# Altium PCB DIOT_EEM_Adapter.pcbdoc (part 2 of 2)
Units mil, origin at the board's own origin, x right, y up, seen from the top; angles counter-clockwise.
Board outline 3439.52 x 3937.01 mil, 6 copper layers (TopLayer, MidLayer1, MidLayer2, SignalLayer1, Internal Plane 1, BottomLayer), stack 60.157 mil thick; 45 components, 66 nets, 409 pads, 76 vias.
Unrouted connection lines stored in the file: 1.
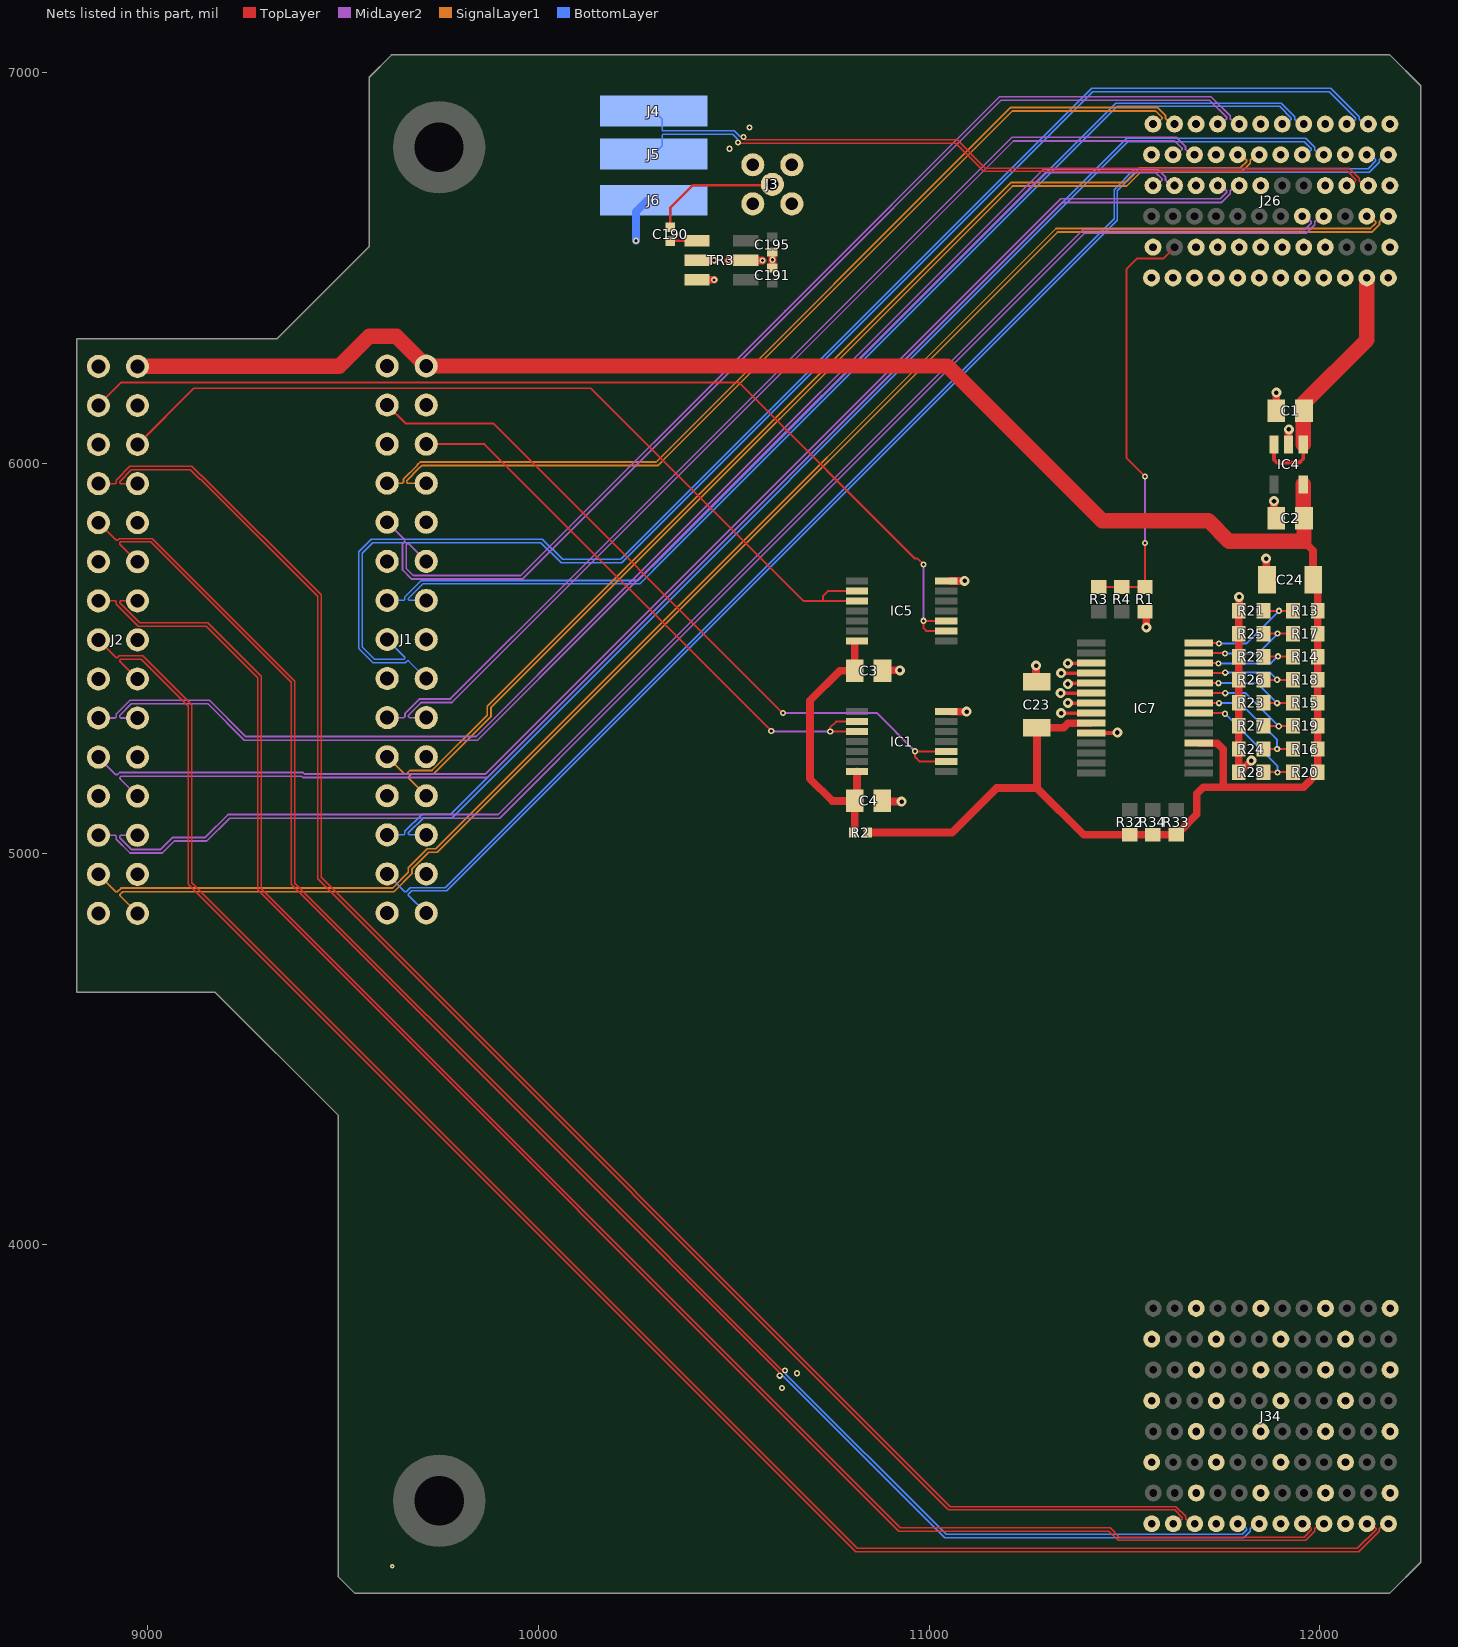
[diagram p6: the nets of this part, all layers, seen from the top]

## Via types
v1: diameter 15.75, hole 7.87, TopLayer to BottomLayer, tented both sides, 56 vias
v2: diameter 25.59, hole 11.81, TopLayer to BottomLayer, tented both sides, 19 vias
v3: diameter 11.81, hole 3.94, TopLayer to BottomLayer, tented both sides, 1 vias

## Nets (pads, with @x,y where several pads share a name; then routed paths per layer and width w, separated by ;. In a path a pad name is that pad's centre, name@x,y a point inside that pad or via, vN(x,y) a via of type N, cw(c..) or ccw(c..) an arc to the next point about the centre after c; other vN are vias at no path point) (continued)
GND: C1.1 C2.1 C3.1 C4.1 C23.1 C24.1 C191.1 C195.2 IC1.7 IC4.2 IC5.7 IC7.3 IC7.4 IC7.5 IC7.6 IC7.7 IC7.8 IC7.10 J1.1 J1.4 J1.7 J1.10 J1.13 J1.16 J1.19 J1.22 J1.25 J2.1 J2.4 J2.7 J2.10 J2.13 J2.16 J2.19 J2.22 J2.25 J3.2 J6.1 J26.A2 J26.A4 J26.A6 J26.C1 J26.C5 J26.D2 J26.D4 J26.D6 J26.E2 J26.F1 J26.F5 J26.G2 J26.G4 J26.G6 J26.I1 J26.I5 J26.J2 J26.J4 J26.J6 J26.L1 J26.L5 J34.A2 J34.A4 J34.A6 J34.A8 J34.C1 J34.C3 J34.C5 J34.C7 J34.D2 J34.D4 J34.D6 J34.D8 J34.F1 J34.F3 J34.F5 J34.F7 J34.G2 J34.G4 J34.G6 J34.G8 J34.I1 J34.I3 J34.I5 J34.I7 J34.J2 J34.J4 J34.J6 J34.J8 J34.L1 J34.L3 J34.L5 J34.L7 R1.1 R21.1 R22.1 R23.1 R24.1 R25.1 R26.1 R27.1 R28.1 TR3.1 TR3.2 TR3.5 | length 1725.7
  TopLayer w9.84: v2(11337,5411.61) IC7.6@11414.91,5411.61 ; v2(11338,5360.43) IC7.8@11414.91,5360.43 ; v2(11338,5462.79) IC7.4@11414.91,5462.79 ; v2(11355,5488) 11355.38,5488.38 IC7.3@11414.91,5488.38 ; v2(11355.38,5386.81) 11356.17,5386.02 IC7.7@11414.91,5386.02 ; v2(11355.38,5435) 11357.57,5437.2 IC7.5@11414.91,5437.2 ; IC7.10@11414.91,5309.24 11480.24,5309.24 v2(11482,5311)
  TopLayer w20: TR3.1@10406.02,6469.64 v1(10450,6469.64) ; TR3.2@10406.02,6519.64 v1(10450,6519.64) ; v1(10487,6519) 10530.58,6519 TR3.5@10531.22,6519.64 10531.86,6519 v1(10574,6519) ; C191.1@10598.84,6499.93 10599,6500.09 v1(10599,6521) 10599,6540.32 C195.2@10598.84,6540.48 ; C3.1@10887.16,5470.11 v2(10925,5470.11) ; C4.1@10892.16,5134.11 v2(10930,5134.11) ; IC5.7@11053.16,5699.11 v2(11091,5699.11) ; IC1.7@11058.16,5364.11 v2(11096,5364.11) ; C23.1@11273.89,5444.16 v2(11273.89,5482) ; v2(11556.11,5580) R1.1@11556.11,5617.84 ; R28.1@11792.11,5204.84 11792.11,5211 11800.43,5219.33 11805.03,5219.33 11824.65,5238.95 v2(11824.79,5238.95) ; R28.1@11792.72,5209.65 R24.1@11792.72,5268.7 R27.1@11792.72,5327.76 R23.1@11792.72,5386.81 R26.1@11792.72,5445.87 R22.1@11792.72,5504.92 R25.1@11792.72,5563.98 R21.1@11792.72,5623.03 ; R21.1@11793.89,5620.16 v2(11793.89,5658) ; C24.1@11862.89,5718.16 v2(11862.89,5756) ; v2(11882.89,5903) 11882.89,5865.16 C2.1@11888.8,5859.25 ; C1.1@11888.8,6134.84 11888.8,6180.8 v2(11889,6181) ; IC4.2@11920.3,6048.23 11920.3,6086.3 v2(11921,6087)
  BottomLayer w20: v1(10250.06,6569.64) 10250.06,6643.86 10279.43,6673.23 J6.1@10295.28,6673.23
  other v1: 10624,3633 10662,3671 10489,6805 10540,6859
  other v3: 9625.98,3177.17
I2C0_SCL: IC1.2 IC1.3 J1.27 | length 1897
  TopLayer w5: J1.27@9613,6149 9660,6102 9884.43,6102 v1@10625.71,5360.71 ; IC1.2@11043.84,5236.62 10976.38,5236.62 10964,5249 v1(10964,5263) 10964.79,5262.21 IC1.3@11043.84,5262.21
  MidLayer2 w5: v1(10626,5361) 10866,5361 v1(10964,5263)
I2C0_SDA: IC1.9 IC1.10 J1.26 | length 1492.5
  TopLayer w5: J1.26@9713,6049 9862,6049 v1(10596,5315) ; IC1.10@10815.5,5313.39 v1(10747,5313.39) 10747,5324 10761.98,5338.98 IC1.9@10815.5,5338.98
  MidLayer2 w5: v1(10596,5315) 10597.61,5313.39 v1(10747,5313.39)
I2C1_SCL: IC5.2 IC5.3 J2.27 | length 2610.9
  TopLayer w5: J2.27@8874,6148 8933,6207 10513,6207 10964,5756 10971,5756 v1(10986,5741) ; IC5.2@11043.84,5571.27 10992.73,5571.27 10986,5578 v1(10986,5596.86) IC5.3@11043.84,5596.86
  MidLayer2 w5: v1(10986,5596.86) v1(10986,5741)
I2C1_SDA: IC5.9 IC5.10 J2.26 | length 2231.6
  TopLayer w5: J2.26@8974,6048 9118,6192 10134,6192 10677.96,5648.04 10728,5648.04 ; IC5.10@10815.5,5648.04 10728,5648.04 ; IC5.9@10815.5,5673.63 10741.63,5673.63 10728,5660 10728,5648.04
ID0: IC7.21 R20.1 R28.2 | length 349.4
  TopLayer w5: IC7.21@11690.5,5360.43 11756.11,5360.43 v1(11757.53,5359) ; R28.2@11855.71,5209.65 R20.1@11931.83,5209.65
  BottomLayer w5: v1(11757.53,5359) 11892,5224.53 v1(11892,5209)
ID1: IC7.22 R16.1 R24.2 | length 338.6
  TopLayer w5: IC7.22@11690.5,5386.02 v1(11742,5386.02) ; R24.2@11855.71,5268.7 R16.1@11931.83,5268.7
  BottomLayer w5: v1(11742,5386.02) 11796.98,5386.02 11891,5292 v1(11891,5269)
ID2: IC7.23 R19.1 R27.2 | length 315.7
  TopLayer w5: IC7.23@11690.5,5411.61 v1(11758,5411.61) ; R27.2@11855.71,5327.76 R19.1@11931.83,5327.76
  BottomLayer w5: v1(11758,5411.61) 11810.39,5411.61 v1(11895,5327)
ID3: IC7.24 R15.1 R23.2 | length 297.8
  TopLayer w5: IC7.24@11690.5,5437.2 v1(11740.62,5437.2) ; R23.2@11855.71,5386.81 R15.1@11931.83,5386.81
  BottomLayer w5: v1(11740.62,5437.2) 11839.82,5437.2 v1(11891,5386.02)
ID4: IC7.25 R18.1 R26.2 | length 284.6
  TopLayer w5: IC7.25@11690.5,5462.79 11756.79,5462.79 v1(11758,5464) ; R26.2@11855.71,5445.87 R18.1@11931.83,5445.87
  BottomLayer w5: v1(11758,5464) 11873,5464 v1(11891,5446)
ID5: IC7.26 R14.1 R22.2 | length 286.2
  TopLayer w5: IC7.26@11690.5,5488.38 11740.62,5488.38 v1(11741,5488) ; R22.2@11855.71,5504.92 R14.1@11931.83,5504.92
  BottomLayer w5: v1(11741,5488) 11875,5488 v1(11893,5506)
ID6: IC7.27 R17.1 R25.2 | length 299.1
  TopLayer w5: IC7.27@11690.5,5513.97 11756.62,5513.97 v1(11757.53,5513.06) ; R25.2@11855.71,5563.98 R17.1@11931.83,5563.98
  BottomLayer w5: v1(11757.53,5513.06) 11841.06,5513.06 v1(11892,5564)
ID7: IC7.28 R13.1 R21.2 | length 326.7
  TopLayer w5: IC7.28@11690.5,5539.56 11746.44,5539.56 11746.44,5539.92 11745.52,5539 v1(11742,5539) ; R21.2@11855.71,5623.03 11856.29,5622.45 v1(11896,5622.45) 11931.24,5622.45 R13.1@11931.83,5623.03
  BottomLayer w5: v1(11742,5539) 11746.14,5539 11746.57,5539.43 11747,5539 11812.55,5539 v1(11896,5622.45)
LVDS0_N: J1.3 J26.B5 | length 3399.6
  BottomLayer w3.74: J1.3@9613,4949 9658.39,4903.61 9661.49,4903.61 9671.93,4914.06 9761.81,4914.06 11473.34,6625.59 11473.34,6700.59 11526.75,6754 12123.52,6754 12143.68,6774.16 12143.68,6777.26 12141.49,6779.45 12141.19,6779.45 12131.16,6789.49 J26.B5@12120.45,6789.49
LVDS0_P: J1.2 J26.A5 | length 3406.8
  BottomLayer w3.74: J1.2@9713,4849 9667.61,4894.39 9667.61,4897.49 9675.52,4905.4 9765.4,4905.4 11482,6622 11482,6697 11530.34,6745.34 12127.11,6745.34 12152.34,6770.57 12152.34,6777.26 12154.53,6779.45 12154.82,6779.45 12164.86,6789.49 J26.A5@12175.57,6789.49
LVDS1_N: J1.6 J26.E5 | length 3132.2
  BottomLayer w3.74: J1.6@9713,5049 9669.52,5049 9667.33,5051.19 9667.33,5054.29 9706.38,5093.34 9779.34,5093.34 11509,6823 11960.14,6823 11978.32,6804.82 11978.32,6801.72 11976.13,6799.53 11975.84,6799.53 11965.8,6789.49 J26.E5@11955.09,6789.49
LVDS1_P: J1.5 J26.D5 | length 3160.9
  BottomLayer w3.74: J1.5@9613,5049 9656.48,5049 9658.67,5051.19 9658.67,5057.88 9702.79,5102 9775.75,5102 9805.38,5131.62 11505.41,6831.66 11963.73,6831.66 11986.98,6808.4 11986.98,6801.72 11989.18,6799.53 11989.47,6799.53 11999.51,6789.49 J26.D5@12010.21,6789.49
LVDS2_N: J1.9 J26.H5 | length 2913.5
  SignalLayer1 w4.53: J1.9@9613,5249 9657.85,5204.15 9661.6,5204.15 9671.12,5213.67 9727.64,5213.67 9869.3,5355.33 9869.3,5378.27 10017.51,5526.48 11210.03,6719 11501.92,6719 11538.92,6756 11796.48,6756 11812.67,6772.19 11812.67,6775.94 11799.13,6789.49 J26.H5@11789.74,6789.49
LVDS2_P: J1.8 J26.G5 | length 2921.2
  SignalLayer1 w4.53: J1.8@9713,5149 9668.15,5193.85 9668.15,5197.6 9674.96,5204.41 9731.47,5204.41 9878.56,5351.5 9878.56,5374.44 10024.06,5519.94 11213.86,6709.75 11505.75,6709.75 11542.75,6746.75 11800.31,6746.75 11821.93,6768.36 11821.93,6775.94 11835.47,6789.49 J26.G5@11844.86,6789.49
LVDS3_N: J1.12 J26.K5 | length 2678.5
  MidLayer2 w4.53: J1.12@9713,5349 9670.28,5349 9667.63,5351.65 9667.63,5355.4 9699.97,5387.75 9778.75,5387.75 10100.29,5709.29 11216,6825 11629.1,6825 11647.32,6806.78 11647.32,6803.03 11633.78,6789.49 J26.K5@11624.39,6789.49
LVDS3_P: J1.11 J26.J5 | length 2709.1
  MidLayer2 w4.53: J1.11@9613,5349 9655.72,5349 9658.37,5351.65 9658.37,5359.23 9696.14,5397 9774.92,5397 10096.46,5718.54 11212.17,6834.25 11632.93,6834.25 11656.57,6810.61 11656.57,6803.03 11670.11,6789.49 J26.J5@11679.5,6789.49
LVDS4_N: J1.15 J26.C6 | length 3566
  BottomLayer w3.74: 9549,5543 9549,5770 9576,5797 10006.75,5797 10058.48,5745.27 10213.27,5745.27 10218,5750 11419.34,6951.34 12024.71,6951.34 12092.5,6883.56 12092.5,6880.46 12090.31,6878.27 12090.01,6878.27 12079.97,6868.23 J26.C6@12069.27,6868.23
  BottomLayer w3.94: 9549,5543 9549,5529.53 9580.33,5498.19 9655.93,5498.19 9658.24,5500.5 9658.24,5503.76 J1.15@9613,5549
LVDS4_P: J1.14 J26.B6 | length 3616.7
  BottomLayer w3.74: 9540.34,5539.33 9540.34,5773.59 9572.41,5805.66 10010.34,5805.66 10062.07,5753.93 10209.68,5753.93 10211.88,5756.12 11415.75,6960 12028.3,6960 12101.16,6887.14 12101.16,6880.46 12103.35,6878.27 12103.64,6878.27 12113.68,6868.23 J26.B6@12124.39,6868.23
  BottomLayer w3.94: 9540.14,5539.33 9540.14,5525.86 9576.66,5489.34 9659.6,5489.34 9664.5,5494.24 9667.76,5494.24 J1.14@9713,5449
LVDS5_N: J1.18 J26.F6 | length 2874.4
  BottomLayer w3.74: 10294.41,5726.41 11481.34,6913.34 11897.36,6913.34 11927,6883.7 11927,6880.6 11914.62,6868.23 J26.F6@11903.91,6868.23
  BottomLayer w3.94: J1.18@9713,5649 9669.74,5649 9667.43,5651.3 9667.43,5654.57 9704,5691.14 10259.42,5691.14 10294.54,5726.27
LVDS5_P: J1.17 J26.E6 | length 2903.4
  BottomLayer w3.74: 10290.88,5735.12 11477.75,6922 11900.95,6922 11935.66,6887.29 11935.66,6880.9 11948.32,6868.23 J26.E6@11959.03,6868.23
  BottomLayer w3.94: J1.17@9613,5649 9656.26,5649 9658.57,5651.3 9658.57,5658.24 9700.34,5700 10255.75,5700 10290.88,5735.12
LVDS6_N: J1.21 J26.I6 | length 2819.6
  MidLayer2 w4.53: J1.21@9613,5849 9657.85,5804.14 9657.85,5800.39 9652.49,5795.03 9652.49,5726.79 9675.71,5703.57 9958.65,5703.57 10635.33,6380.25 11184.22,6929.13 11717.88,6929.13 11761.49,6885.52 11761.49,6881.77 11747.95,6868.23 J26.I6@11738.56,6868.23
LVDS6_P: J1.20 J26.H6 | length 2812.1
  MidLayer2 w4.53: J1.20@9713,5749 9668.15,5793.85 9664.4,5793.85 9661.74,5791.2 9661.74,5730.62 9679.54,5712.82 9697.82,5712.82 9697.96,5712.68 9728.04,5712.68 9728.18,5712.82 9954.82,5712.82 10631.5,6389.5 11180.39,6938.39 11721.71,6938.39 11770.74,6889.35 11770.74,6881.77 11784.29,6868.23 J26.H6@11793.68,6868.23
LVDS7_N: J1.24 J26.L6 | length 2419.1
  SignalLayer1 w4.53: J1.24@9713,5949 9665.66,5949 9663.01,5951.65 9663.01,5955.73 9694.14,5986.86 9701.42,5994.14 10304.58,5994.14 10305.14,5994.14 10325.81,6014.81 11212.64,6901.64 11580.02,6901.64 11596.14,6885.52 11596.14,6881.77 11582.59,6868.23 J26.L6@11573.2,6868.23
LVDS7_P: J1.23 J26.K6 | length 2440.6
  SignalLayer1 w4.53: J1.23@9613,5949 9651.89,5949 9654.54,5951.65 9654.54,5959.23 9690.86,5995.56 ; 9690.31,5996.11 9697.59,6003.39 10300.75,6003.39 10301.31,6003.39 11208.81,6910.9 11583.85,6910.9 11605.39,6889.35 11605.39,6881.77 11618.93,6868.23 J26.K6@11628.32,6868.23
LVDS8_N: J2.3 J26.B3 | length 4036
  SignalLayer1 w4.53: J2.3@8874,4948 8918.85,4903.15 8922.6,4903.15 8932.12,4912.67 9626.64,4912.67 9667.15,4953.18 9667.15,4964.7 9716.11,5013.67 9737.55,5013.67 10155.94,5432.06 11324.89,6601 12129.67,6601 12143.38,6614.71 12143.38,6618.46 12129.84,6632.01 J26.B3@12120.45,6632.01
LVDS8_P: J2.2 J26.A3 | length 4043.6
  SignalLayer1 w4.53: J2.2@8974,4848 8929.15,4892.85 8929.15,4896.6 8935.96,4903.41 9630.47,4903.41 9676.4,4949.35 9676.4,4960.87 9719.95,5004.41 9741.38,5004.41 10159.77,5422.81 11328.72,6591.75 12133.5,6591.75 12152.63,6610.88 12152.63,6618.46 12166.18,6632.01 J26.A3@12175.57,6632.01
LVDS9_N: J2.6 J26.E3 | length 3808.3
  MidLayer2 w4.53: J2.6@8974,5048 8931.28,5048 8928.63,5045.35 8928.63,5041.6 8958.54,5011.68 9033.15,5011.68 9064.01,5042.54 9147.46,5042.54 9205.92,5101 9896.92,5101 11393.92,6598 11961.31,6598 11978.03,6614.71 11978.03,6618.46 11964.48,6632.01 J26.E3@11955.09,6632.01
LVDS9_P: J2.5 J26.D3 | length 3839
  MidLayer2 w4.53: J2.5@8874,5048 8916.72,5048 8919.37,5045.35 8919.37,5037.77 8954.71,5002.43 9036.98,5002.43 9067.84,5033.29 9151.29,5033.29 9209.75,5091.75 9900.75,5091.75 10205.75,5396.75 11397.75,6588.75 11965.15,6588.75 11987.28,6610.88 11987.28,6618.46 12000.82,6632.01 J26.D3@12010.21,6632.01
LVDS10_N: J2.9 J26.I4 | length 3558.6
  MidLayer2 w4.53: J2.9@8874,5248 8918.85,5203.15 8922.6,5203.15 8927.97,5208.51 9397.73,5208.51 9401.23,5205 9864.92,5205 11336.92,6677 11745.04,6677 11761.49,6693.45 11761.49,6697.2 11747.95,6710.75 J26.I4@11738.56,6710.75
LVDS10_P: J2.8 J26.H4 | length 3566.2
  MidLayer2 w4.53: J2.8@8974,5148 8929.15,5192.85 8929.15,5196.6 8931.8,5199.26 9393.89,5199.26 9397.4,5195.75 9868.75,5195.75 10170.75,5497.75 11340.75,6667.75 11748.87,6667.75 11770.74,6689.62 11770.74,6697.2 11784.29,6710.75 J26.H4@11793.68,6710.75
LVDS11_N: J2.12 J26.L4 | length 3409.3
  MidLayer2 w4.53: J2.12@8974,5348 8931.28,5348 8928.63,5350.65 8928.63,5354.4 8958.54,5384.32 9154.6,5384.32 9247.63,5291.29 9844.29,5291.29 10158.79,5605.79 11297,6744 11580.18,6744 11596.14,6728.04 11596.14,6724.29 11582.59,6710.75 J26.L4@11573.2,6710.75
LVDS11_P: J2.11 J26.K4 | length 3440
  MidLayer2 w4.53: J2.11@8874,5348 8916.72,5348 8919.37,5350.65 8919.37,5358.23 8954.71,5393.57 9158.43,5393.57 9251.46,5300.54 9840.46,5300.54 10154.96,5615.04 11293.17,6753.25 11584.01,6753.25 11605.39,6731.87 11605.39,6724.29 11618.93,6710.75 J26.K4@11628.32,6710.75
LVDS12_N: J2.15 J34.B1 | length 4555.4
  TopLayer w3.74: J2.15@8874,5548 8919.39,5502.61 8922.49,5502.61 8927.21,5507.34 8987.25,5507.34 9113,5381.59 9113,4926 10816.34,3222.66 12096.3,3222.66 12144.17,3270.54 12144.17,3273.64 12141.98,3275.83 12141.69,3275.83 12131.65,3285.87 J34.B1@12120.94,3285.87
LVDS12_P: J2.14 J34.A1 | length 4562.6
  TopLayer w3.74: J2.14@8974,5448 8928.61,5493.39 8928.61,5496.49 8930.8,5498.68 8983.66,5498.68 9104.34,5378 9104.34,4922.41 10807.68,3219.07 10812.75,3214 12099.88,3214 12152.83,3266.95 12152.83,3273.64 12155.03,3275.83 12155.32,3275.83 12165.36,3285.87 J34.A1@12176.06,3285.87
LVDS13_N: J2.18 J34.E1 | length 4451.6
  TopLayer w3.74: J2.18@8974,5656.66 8965.34,5648 8930.52,5648 8928.33,5645.81 8928.33,5642.71 8979.44,5591.6 9153.99,5591.6 9290.77,5454.82 9290.77,4911.48 10926.42,3275.83 11463.12,3275.83 11487.29,3251.66 11507,3251.66 11959.94,3251.66 11978.82,3270.54 11978.82,3273.64 11976.63,3275.83 11976.34,3275.83 11966.3,3285.87 J34.E1@11955.59,3285.87
LVDS13_P: J2.17 J34.D1 | length 4476.8
  TopLayer w3.74: J2.17@8874,5648 8917.48,5648 8919.67,5645.81 8919.67,5639.12 8975.85,5582.94 9150.4,5582.94 9282.11,5451.23 9282.11,4907.89 10922.83,3267.17 11459.54,3267.17 11483.7,3243 11503.41,3243 11963.53,3243 11987.48,3266.95 11987.48,3273.64 11989.67,3275.83 11989.96,3275.83 12000,3285.87 J34.D1@12010.71,3285.87
LVDS14_N: J2.21 J34.H1 | length 4359.5
  TopLayer w3.74: J2.21@8874,5848 8919.39,5802.61 8922.49,5802.61 8927.21,5807.34 9011.91,5807.34 9376.66,5442.59 9376.66,4925.59 10054.62,4247.62 10621.83,3680.42 10629.35,3680.42 v1(10631.38,3678.38)
  BottomLayer w3.74: v1(10631.38,3678.38) 10633.42,3676.35 10633.42,3668.83 11043.65,3258.6 11801.53,3258.6 11813.46,3270.54 11813.46,3273.64 11811.27,3275.83 11810.98,3275.83 11800.94,3285.87 J34.H1@11790.24,3285.87
LVDS14_P: J2.20 J34.G1 | length 4366.7
  TopLayer w3.74: J2.20@8974,5748 8928.61,5793.39 8928.61,5796.49 8930.8,5798.68 9008.32,5798.68 9368,5439 9368,4922 10048.5,4241.5 10615.71,3674.29 10615.71,3666.78 v1(10617.74,3664.74)
  BottomLayer w3.74: v1(10617.74,3664.74) 10619.78,3662.71 10627.29,3662.71 11040.06,3249.94 11805.12,3249.94 11822.13,3266.95 11822.13,3273.64 11824.32,3275.83 11824.61,3275.83 11834.65,3285.87 J34.G1@11845.35,3285.87
LVDS15_N: J2.24 J34.K1 | length 4347.8
  TopLayer w3.74: J2.24@8974,5948 8930.52,5948 8928.33,5950.19 8928.33,5953.29 8958.18,5983.14 9109.62,5983.14 9133.2,5959.55 9135.45,5959.55 9435.34,5659.66 9435.34,4936.41 11045.68,3326.07 11050.75,3321 11628.3,3321 11648.11,3301.19 11648.11,3298.1 11645.92,3295.9 11645.63,3295.9 11635.59,3285.87 J34.K1@11624.88,3285.87
LVDS15_P: J2.23 J34.J1 | length 4376.5
  TopLayer w3.74: J2.23@8874,5948 8917.48,5948 8919.67,5950.19 8919.67,5956.88 8954.59,5991.8 9113.2,5991.8 9136.79,5968.21 9139.04,5968.21 9444,5663.25 9444,4940 11054.34,3329.66 11631.89,3329.66 11656.77,3304.78 11656.77,3298.1 11658.96,3295.9 11659.25,3295.9 11669.29,3285.87 J34.J1@11680,3285.87
NetC190_1: C190.1 J3.1 | length 336.4
  TopLayer w6.39: C190.1@10337,6603.72 10337,6653 10396,6712 10596.84,6712 J3.1@10598.84,6714
NetC190_2: C190.2 TR3.3 | length 74.8
  TopLayer w6.39: C190.2@10334,6562.9 10340.74,6569.64 TR3.3@10406.02,6569.64
P3V3MP: C2.2 C23.2 C24.2 IC4.5 IC7.9 IC7.18 J1.30 J2.30 R2.1 R13.2 R14.2 R15.2 R16.2 R17.2 R18.2 R19.2 R20.2 R32.2 R33.2 R34.2 | length 5841
  TopLayer w20: R2.1@10843.01,5055 11059,5055 11173,5169 11276,5169 ; IC7.9@11414.91,5334.83 11355.89,5334.83 11344,5322.94 C23.2@11276,5322.94 11276,5169 ; IC7.18@11690.5,5283.65 11737.35,5283.65 11753,5268 11753,5171 ; C2.2@11957.7,5861.22 C2.2@11959.67,5859.25 11959.67,5799.33 11983.01,5775.99 C24.2@11983.01,5701.77 ; C24.2@11994.82,5689.96 R13.2@11994.82,5623.03 R17.2@11994.82,5563.98 R14.2@11994.82,5504.92 R18.2@11994.82,5445.87 R15.2@11994.82,5386.81 R19.2@11994.82,5327.76 R16.2@11994.82,5268.7 R20.2@11994.82,5209.65 11994.82,5207.68 11958.14,5171 11753,5171 ; 11276,5169 11395.7,5049.3 R32.2@11513.25,5049.3 R34.2@11572.31,5049.3 11634.76,5049.3 11642.69,5057.22 11642.69,5058.98 11685.35,5101.65 11685.35,5154.35 11702,5171 11753,5171
  TopLayer w39.37: J2.30@8974,6248 9490,6248 9567,6325 9637,6325 J1.30@9713,6249 11047,6249 11443,5853 11715,5853 11768,5800 11959.67,5800 C2.2@11959.67,5859.25 ; C2.2@11957.7,5861.22 IC4.5@11957.7,5945.87
P12V0: J1.28 J1.29 J2.28 J2.29 J26.A1 J26.D1 J26.E1 J26.G1 J26.H1 J26.J1 J26.K1
reserved: J26.F2
RST#: J26.H2
SLOT_EN#: J26.L2 R1.2 R3.2 R4.2 | length 1098.6
  TopLayer w5: R3.2@11434.51,5683.16 R4.2@11493.57,5683.16 R1.2@11552.62,5683.16 11552.62,5795.62 v1(11553,5796) ; v1(11553,5966) 11505,6014 11505,6497 11532,6524 11599.06,6524 11628.32,6553.27
  MidLayer2 w5: v1(11553,5796) v1(11553,5966)
STANDBY: C1.2 IC4.1 IC4.3 J26.B1 | length 651.2
  TopLayer w10: IC4.3@11882.89,6048.23 11882.89,6009.11 11890,6002 11948.09,6002 11957.7,6011.6 IC4.1@11957.7,6048.23
  TopLayer w39.37: IC4.1@11957.7,6048.23 11957.7,6152.7 12120.45,6315.45 J26.B1@12120.45,6474.53
USB_N: J5.1 J26.C4 | length 1918.2
  TopLayer w3.74: v1(10511.12,6821.12) 10513.15,6819.08 11067.92,6819.08 11140,6747 12071.57,6747 12092.5,6726.08 12092.5,6722.98 12090.31,6720.79 12090.01,6720.79 12079.97,6710.75 J26.C4@12069.27,6710.75
  BottomLayer w3.74: J5.1@10295.28,6791.34 10316.57,6812.64 10316.57,6839.97 10318.77,6842.16 10497.59,6842.16 10509.08,6830.67 10509.08,6823.15 v1(10511.12,6821.12)
USB_P: J4.1 J26.B4 | length 1931
  TopLayer w3.74: v1(10524.76,6834.76) 10526.79,6832.72 10526.79,6827.74 11071.51,6827.74 11143.59,6755.66 12075.16,6755.66 12101.16,6729.66 12101.16,6722.98 12103.35,6720.79 12103.64,6720.79 12113.68,6710.75 J26.B4@12124.39,6710.75
  BottomLayer w3.74: J4.1@10295.28,6901.64 10316.57,6880.34 10316.57,6853.01 10318.77,6850.82 10501.18,6850.82 10515.21,6836.79 10522.72,6836.79 v1(10524.76,6834.76)
VCC: C3.2 C4.2 IC1.14 IC5.14 R2.2 | length 715.2
  TopLayer w20: R2.2@10806,5055 10809.57,5058.57 C4.2@10809.57,5136 ; IC5.14@10810,5540.18 C3.2@10810,5469 10772,5469 10695,5392 10695,5193 10752,5136 C4.2@10809.57,5136 ; IC1.14@10815.5,5211.03 10815.5,5141.93 C4.2@10809.57,5136
WAKE_OUT#: J26.I2
pads on no net: IC4.4 IC7.11 IC7.14 IC7.19 IC7.20 J26.G3 J26.I3 J26.J3 J26.K2 J26.K3 J26.L3 J34.A3 J34.A5 J34.A7 J34.B2 J34.B3 J34.B4 J34.B5 J34.B6 J34.B7 J34.B8 J34.C2 J34.C4 J34.C6 J34.C8 J34.D3 J34.D5 J34.D7 J34.E2 J34.E3 J34.E4 J34.E5 J34.E6 J34.E7 J34.E8 J34.F2 J34.F4 J34.F6 J34.F8 J34.G3 J34.G5 J34.G7 J34.H2 J34.H3 J34.H4 J34.H5 J34.H6 J34.H7 J34.H8 J34.I2 J34.I4 J34.I6 J34.I8 J34.J3 J34.J5 J34.J7 J34.K2 J34.K3 J34.K4 J34.K5 J34.K6 J34.K7 J34.K8 J34.L2 J34.L4 J34.L6 J34.L8
copper on no net: | length 27.3
  SignalLayer1 w3.15: 11974.88,3816.41 11975.39,3816.93 11975.39,3826.77 ; 11982.48,3829.71 11982.48,3816.93 11985.24,3814.17

## Polygon pours and split planes (outlines as drawn)
GND on TopLayer "esd1" (solid, remove dead copper, pour order 189): 12179.67,3108.27 12278.11,3206.69 9600,3206.69 9600,3108.27
no net on Mechanical 9 "Panelisation" (hatched 45Degree grid 100 track 3.94): 2910.43,3014.17 12952.76,3014.18 12952.76,2423.62 2910.43,2423.62
no net on Mechanical 9 "Panelisation" (hatched 45Degree grid 100 track 3.94): 2910.47,7140.16 12950.39,7140.16 12950.39,7730.71 2910.47,7730.71
P12V0 on BottomLayer "P12V0_L06_P190" (solid, remove dead copper, pour order 190): 9448.82,5895.67 9564.22,6011.07 9724.26,6011.07 9793.31,6080.11 9793.31,6285.07 9779.17,6299.21 8838.58,6299.21 8838.58,4675.2 9202.76,4675.2 9537.4,4340.55 9537.4,3927.17 9566.93,3897.64 12160.32,3897.64 12214.57,3951.89 12214.57,6338.58 12224.41,6348.43 12224.41,6515.75 11525.59,6515.75 9862.2,4852.36 9549.36,4852.36 9448.82,4952.91
GND on Internal Plane 1 (split plane): 12238.32,6958.22 12238.32,3195.33 12171.35,3128.36 9537.85,3128.36 9508.29,3157.93 9508.29,4330.71 9507.9,4334.63 9506.76,4338.4 9504.9,4341.87 9502.4,4344.92 9187.44,4659.88 9184.39,4662.38 9180.92,4664.24 9177.15,4665.38 9173.23,4665.77 8838.99,4665.77 8838.99,6298.8 9330.71,6298.8 9334.63,6299.19 9338.4,6300.33 9341.87,6302.19 9344.92,6304.69 9581.14,6540.91 9583.64,6543.95 9585.5,6547.43 9586.64,6551.2 9587.03,6555.12 9587.03,6979.86 9632.34,7025.18 12171.36,7025.18
GND on MidLayer1 (split plane): 12238.32,6958.22 12238.32,3195.33 12171.35,3128.36 9537.85,3128.36 9508.29,3157.93 9508.29,4330.71 9507.9,4334.63 9506.76,4338.4 9504.9,4341.87 9502.4,4344.92 9187.44,4659.88 9184.39,4662.38 9180.92,4664.24 9177.15,4665.38 9173.23,4665.77 8838.99,4665.77 8838.99,6298.8 9330.71,6298.8 9334.63,6299.19 9338.4,6300.33 9341.87,6302.19 9344.92,6304.69 9581.14,6540.91 9583.64,6543.95 9585.5,6547.43 9586.64,6551.2 9587.03,6555.12 9587.03,6979.86 9632.34,7025.18 12171.36,7025.18

## Keep-outs
Keep-Out Layer:
  the board outline again, w7.87

## Other copper
MidLayer1 (plane layer: these items are gaps in the copper):
  text "GND" at 11325,3250 h100

## Silkscreen, mask and mechanical layers (free items; w line width, h text height)
Top Paste:
  text ".Layer_Name" at 8737.4,1533.27 h75
Bottom Paste:
  text ".Layer_Name" at 10237.4,1533.27 h75
TopSolder:
  rectangle: 3620,3132 12234,3202.76
  rectangle: 7040.35,3301.18 7060.04,3348.43
  rectangle: 8445.87,6854.33 9563.98,6899.61
  rectangle: 9512.8,6099.41 9562.01,6900.59
  rectangle: 8445.87,6100.39 9561.02,6142.72
  rectangle: 8442.91,6516.73 8480.32,6898.62
  rectangle: 8446.85,6104.33 8480.32,6482.28
  rectangle: 8446.85,5255.91 8480.32,5633.86
  rectangle: 8442.91,5668.31 8480.32,6050.2
  rectangle: 8445.87,5251.97 9561.02,5294.29
  rectangle: 9512.8,5250.98 9562.01,6052.17
  rectangle: 8445.87,6005.91 9563.98,6051.18
  region: 11707.17,5145.87 11707.17,5008.08 12256.89,5008.08 12256.89,5145.87
  text ".Layer_Name" at 6375.2,1633.27 h75
BottomSolder:
  rectangle: 3620,3132 12234,3202.76
  region: 11707.17,5145.87 11707.17,5008.08 12256.89,5008.08 12256.89,5145.87
  text ".Layer_Name" at 10237.4,1633.27 h75
Mechanical 1:
  the board outline again, w3.94
Corners:
  lines w10: 12258.12,2911.42 12258.12,3108.27 12454.97,3108.27 ; 12258.12,7242.12 12258.12,7045.27 12454.97,7045.27
Mechanical 9:
  region: 6154.53,6870.74 6233.27,6883.86 6154.53,6896.98
  region: 6282.48,6883.86 6361.22,6870.74 6361.22,6896.98
  pour cut-out: 12507.77,2597.74 11857.77,2597.74 11857.77,2841.49 12507.77,2841.49
  pour cut-out: 3353.05,2840.06 4003.05,2840.06 4003.05,2596.31 3353.05,2596.31
  pour cut-out: 11867.77,7558.98 12067.77,7558.98 12067.77,7315.23 11867.77,7315.23
  lines w7.87: 2910.43,3014.17 12948.82,3014.17 ; 2910.43,7140.16 12950.39,7140.16 ; 3626.22,2719.09 3800.3,2719.09 ; 3991.22,2719.09 11888.78,2719.09 ; 6075.79,6883.86 6154.53,6883.86 ; 6233.27,6750 6233.27,6998.43 ; 6233.27,6883.86 6282.48,6883.86 ; 6282.48,6850.39 6282.48,7045.67 ; 6361.22,6883.86 6550.57,6883.86 ; 8280.51,6846.46 8280.51,7094.88 ; 8516.73,6846.46 8516.73,7092.91 ; 12075.1,2719.09 12249.17,2719.09 ; 12092.56,7372.32 12076.81,7388.07 ; 12092.56,7403.82 12076.81,7388.07 ; 12162.4,7730.71 2910.43,7730.71 2910.43,2423.62 12953.74,2423.62 ; 12555.12,6314.73 12555.12,7073.23 12555.12,7140.7 12307.75,7388.07 12076.81,7388.07 ; 12950.39,2423.62 12950.39,7730.71
  lines w10: 4067.91,3108.66 4067.91,7045.67 ; 4067.92,7001.97 4067.92,7120.08 ; 6233.27,3108.66 6233.27,7045.67 ; 6233.28,3065.36 6233.28,3183.47 ; 6233.28,7002.36 6233.28,7120.47 ; 8398.62,3108.66 8398.62,7045.67 ; 8398.63,3065.36 8398.63,3183.47 ; 8398.63,7002.36 8398.63,7120.47 ; 10563.98,3065.36 10563.98,3183.47 ; 10563.98,3108.66 10563.98,7045.67 ; 10563.98,7002.36 10563.98,7120.47 ; 10863.3,6844.99 10683.66,7024.63 ; 10867.13,6844.88 11347.83,6844.88 ; 12257.48,3002.36 12257.48,3108.66 ; 12533.46,3133.66 12533.46,2891.97 12480.35,2838.86 ; 10683.66,7024.63 10703.35,6965.58 10742.72,7004.95 10683.66,7024.63 ; 12480.35,2838.86 12539.41,2858.55 12500.04,2897.92 12480.35,2838.86
  text "Area Without Copper and Without Solder Mask - On Both Sides" at 6221.46,7470.87 h100
  text "6.0" at 8624.78,6917.32 h59.06
  text "1.25" at 6392.5,6915.36 h59.06
  text "NOT PLATED HOLES" at 10874.01,6870.08 h78.74
  text "Ø0.8" at 10869.09,6771.65 h78.74
  text "3x OPTICAL TARGET" at 12531.3,6060.63 h118.11 r90
  text "Ø2mm Not Drilled" at 12643.8,6060.63 h118.11 r90
  text "Dimensions are rounded to 0.1mm. Gerber data is the reference" at 12908.46,3408.66 h118.11 r90
  text "ALL DIMENSIONS ARE IN MILLIMETERS" at 12795.96,3171.16 h196.85 r90
  text "Ø3.5 ±0.05" at 12495.96,3158.66 h78.74 r90
  text "NOT PLATED HOLE" at 12570.96,3158.66 h78.74 r90
  text "Area Without Copper and Without Solder Mask - On Both Sides" at 6371.06,2809.45 h100

## Dimensions
11967.77,7558.98 to 12950.39,7730.71 on Mechanical 9
12067.77,7437.11 to 12162.4,7730.71 on Mechanical 9
2910.43,2423.62 to 3500.98,2718.9 on Mechanical 9
2910.43,2423.62 to 3241.14,3108.27 on Mechanical 9

## Text inside footprints (layer, text, board x,y; h text height)
J1: TopOverlay "30" at 9828,6214 h47.24 r90; Mechanical 14 "30" at 9828,6214 h47.24 r90
J2: TopOverlay "30" at 9089,6213 h47.24 r90; Mechanical 14 "30" at 9089,6213 h47.24 r90
J26: TopOverlay "1" at 11390.13,6460.75 h39.37 r90; TopOverlay "L" at 11588.95,6387.91 h39.37 r90; TopOverlay "2" at 11390.13,6539.49 h39.37 r90; TopOverlay "K" at 11644.07,6387.91 h39.37 r90; TopOverlay "J" at 11699.19,6387.91 h39.37 r90; TopOverlay "I" at 11754.31,6397.76 h39.37 r90; TopOverlay "H" at 11809.43,6387.91 h39.37 r90; TopOverlay "G" at 11864.54,6387.91 h39.37 r90; TopOverlay "F" at 11919.66,6387.91 h39.37 r90; TopOverlay "3" at 11390.13,6618.23 h39.37 r90; TopOverlay "4" at 11390.13,6696.97 h39.37 r90; TopOverlay "5" at 11390.13,6775.71 h39.37 r90; TopOverlay "6" at 11390.13,6854.45 h39.37 r90; TopOverlay "E" at 11974.78,6387.91 h39.37 r90; TopOverlay "D" at 12029.9,6387.91 h39.37 r90; TopOverlay "C" at 12085.02,6348.54 h39.37 r90; TopOverlay "B" at 12140.13,6348.54 h39.37 r90; TopOverlay "A" at 12195.25,6348.54 h39.37 r90; Mechanical 14 "L" at 11588.95,6387.91 h39.37 r90; Mechanical 14 "2" at 11390.13,6539.49 h39.37 r90; Mechanical 14 "1" at 11390.13,6460.75 h39.37 r90; Mechanical 14 "K" at 11644.07,6387.91 h39.37 r90; Mechanical 14 "J" at 11699.19,6387.91 h39.37 r90; Mechanical 14 "I" at 11754.31,6397.76 h39.37 r90; Mechanical 14 "H" at 11809.43,6387.91 h39.37 r90; Mechanical 14 "G" at 11864.54,6387.91 h39.37 r90; Mechanical 14 "F" at 11919.66,6387.91 h39.37 r90; Mechanical 14 "3" at 11390.13,6618.23 h39.37 r90; Mechanical 14 "4" at 11390.13,6696.97 h39.37 r90; Mechanical 14 "5" at 11390.13,6775.71 h39.37 r90; Mechanical 14 "6" at 11390.13,6854.45 h39.37 r90; Mechanical 14 "E" at 11974.78,6387.91 h39.37 r90; Mechanical 14 "D" at 12029.9,6387.91 h39.37 r90; Mechanical 14 "C" at 12085.02,6348.54 h39.37 r90; Mechanical 14 "B" at 12140.13,6348.54 h39.37 r90; Mechanical 14 "A" at 12195.25,6348.54 h39.37 r90; Notvisible "Edge of Daugher Card" at 12287.77,6544.41 h19.68 r90; Notvisible "Top Surface of Mother Board" at 12740.53,6499.13 h19.68 r90
J34: Drill Drawing "Diam. 0.5mm +/-0.05" at 11569.76,3031.5 h39.37; TopOverlay "8" at 11390.63,3823.27 h39.37 r90; TopOverlay "7" at 11390.63,3744.53 h39.37 r90; TopOverlay "6" at 11390.63,3665.79 h39.37 r90; TopOverlay "5" at 11390.63,3587.05 h39.37 r90; TopOverlay "4" at 11390.63,3508.31 h39.37 r90; TopOverlay "3" at 11390.63,3429.57 h39.37 r90; TopOverlay "2" at 11390.63,3350.83 h39.37 r90; TopOverlay "1" at 11390.63,3272.09 h39.37 r90; Mechanical 14 "A" at 12195.75,3159.88 h39.37 r90; Mechanical 14 "B" at 12140.63,3159.88 h39.37 r90; Mechanical 14 "C" at 12085.51,3159.88 h39.37 r90; Mechanical 14 "D" at 12030.39,3199.25 h39.37 r90; Mechanical 14 "E" at 11975.28,3199.25 h39.37 r90; Mechanical 14 "F" at 11920.16,3199.25 h39.37 r90; Mechanical 14 "8" at 11390.63,3823.27 h39.37 r90; Mechanical 14 "7" at 11390.63,3744.53 h39.37 r90; Mechanical 14 "6" at 11390.63,3665.79 h39.37 r90; Mechanical 14 "5" at 11390.63,3587.05 h39.37 r90; Mechanical 14 "G" at 11865.04,3199.25 h39.37 r90; Mechanical 14 "H" at 11809.92,3199.25 h39.37 r90; Mechanical 14 "I" at 11754.8,3209.09 h39.37 r90; Mechanical 14 "4" at 11390.63,3508.31 h39.37 r90; Mechanical 14 "3" at 11390.63,3429.57 h39.37 r90; Mechanical 14 "J" at 11699.68,3199.25 h39.37 r90; Mechanical 14 "K" at 11644.57,3199.25 h39.37 r90; Mechanical 14 "2" at 11390.63,3350.83 h39.37 r90; Mechanical 14 "L" at 11589.45,3199.25 h39.37 r90; Mechanical 14 "1" at 11390.63,3272.09 h39.37 r90; Notvisible "Edge of Daugher Card" at 12288.27,3434.49 h19.68 r90; Notvisible "Top Surface of Mother Board" at 12741.02,3389.21 h19.68 r90